# Altium PCB Relay-2.PcbDoc
Units mil, origin at the board's own origin, x right, y up, seen from the top; angles counter-clockwise.
Board outline 1327.97 x 1106.56 mil, 2 copper layers (Top Layer, Bottom Layer); 6 components, 7 nets, 22 pads, 0 vias.
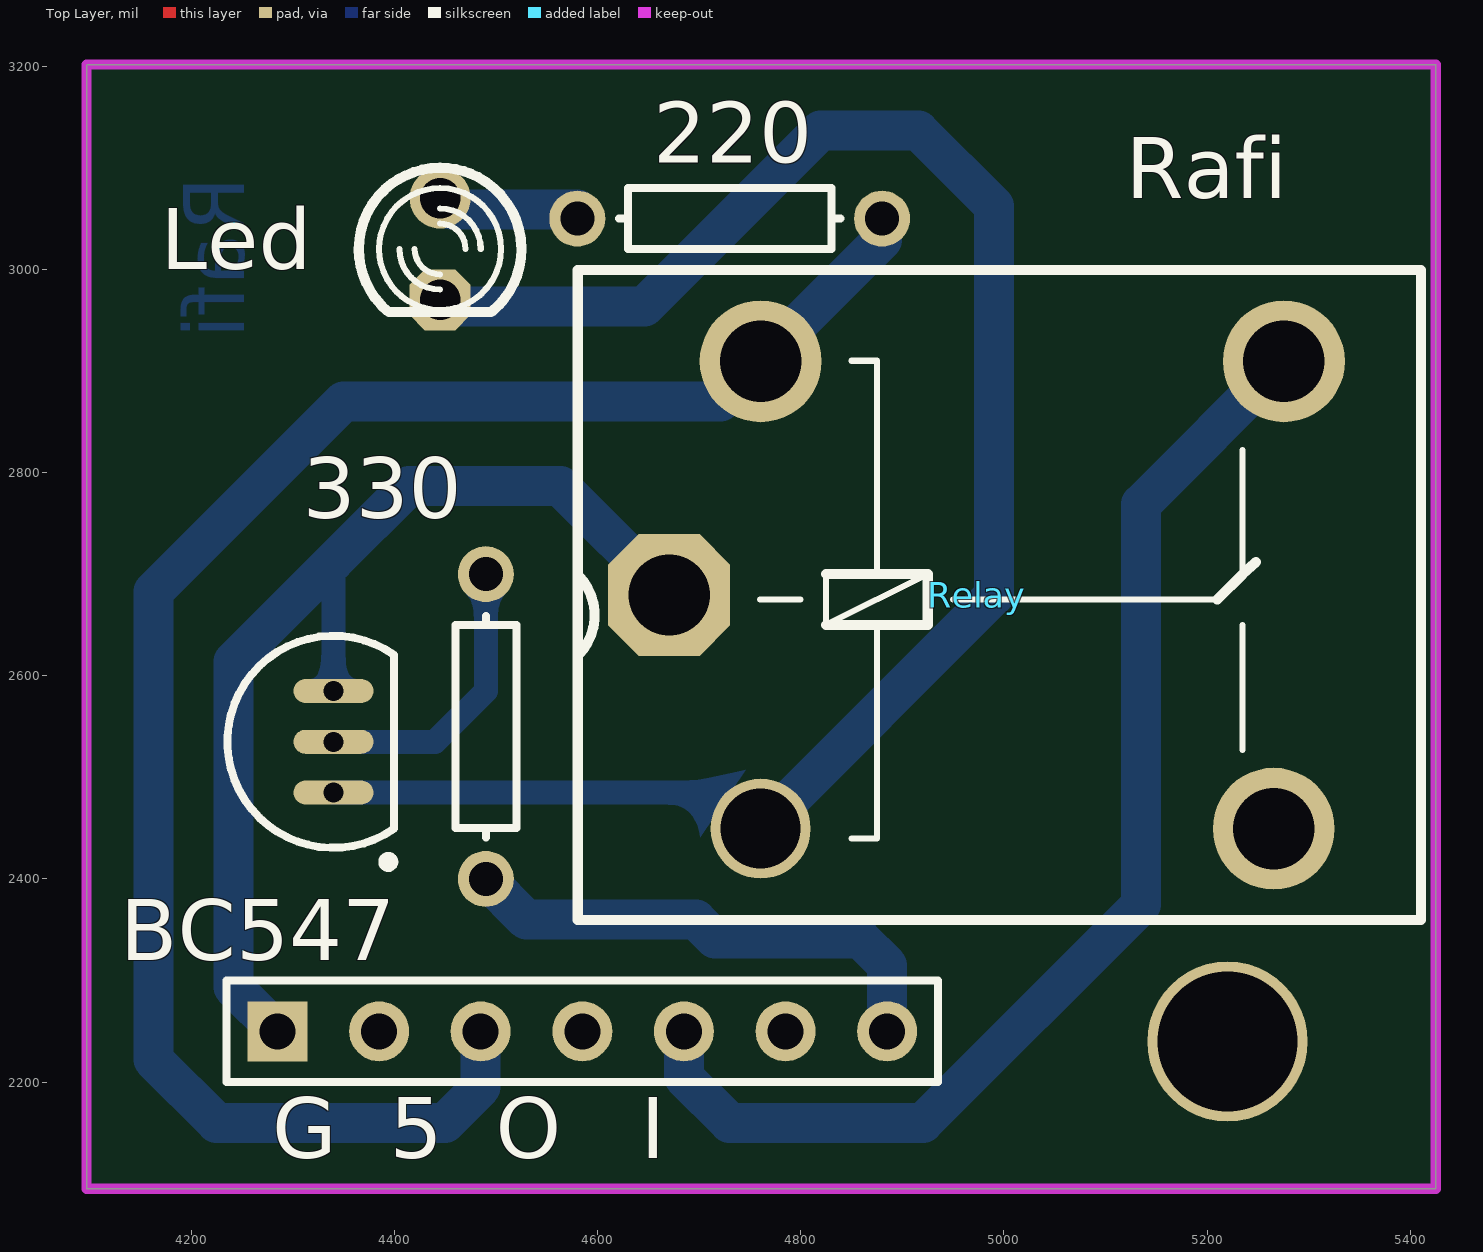
[diagram p0: Top Layer view]
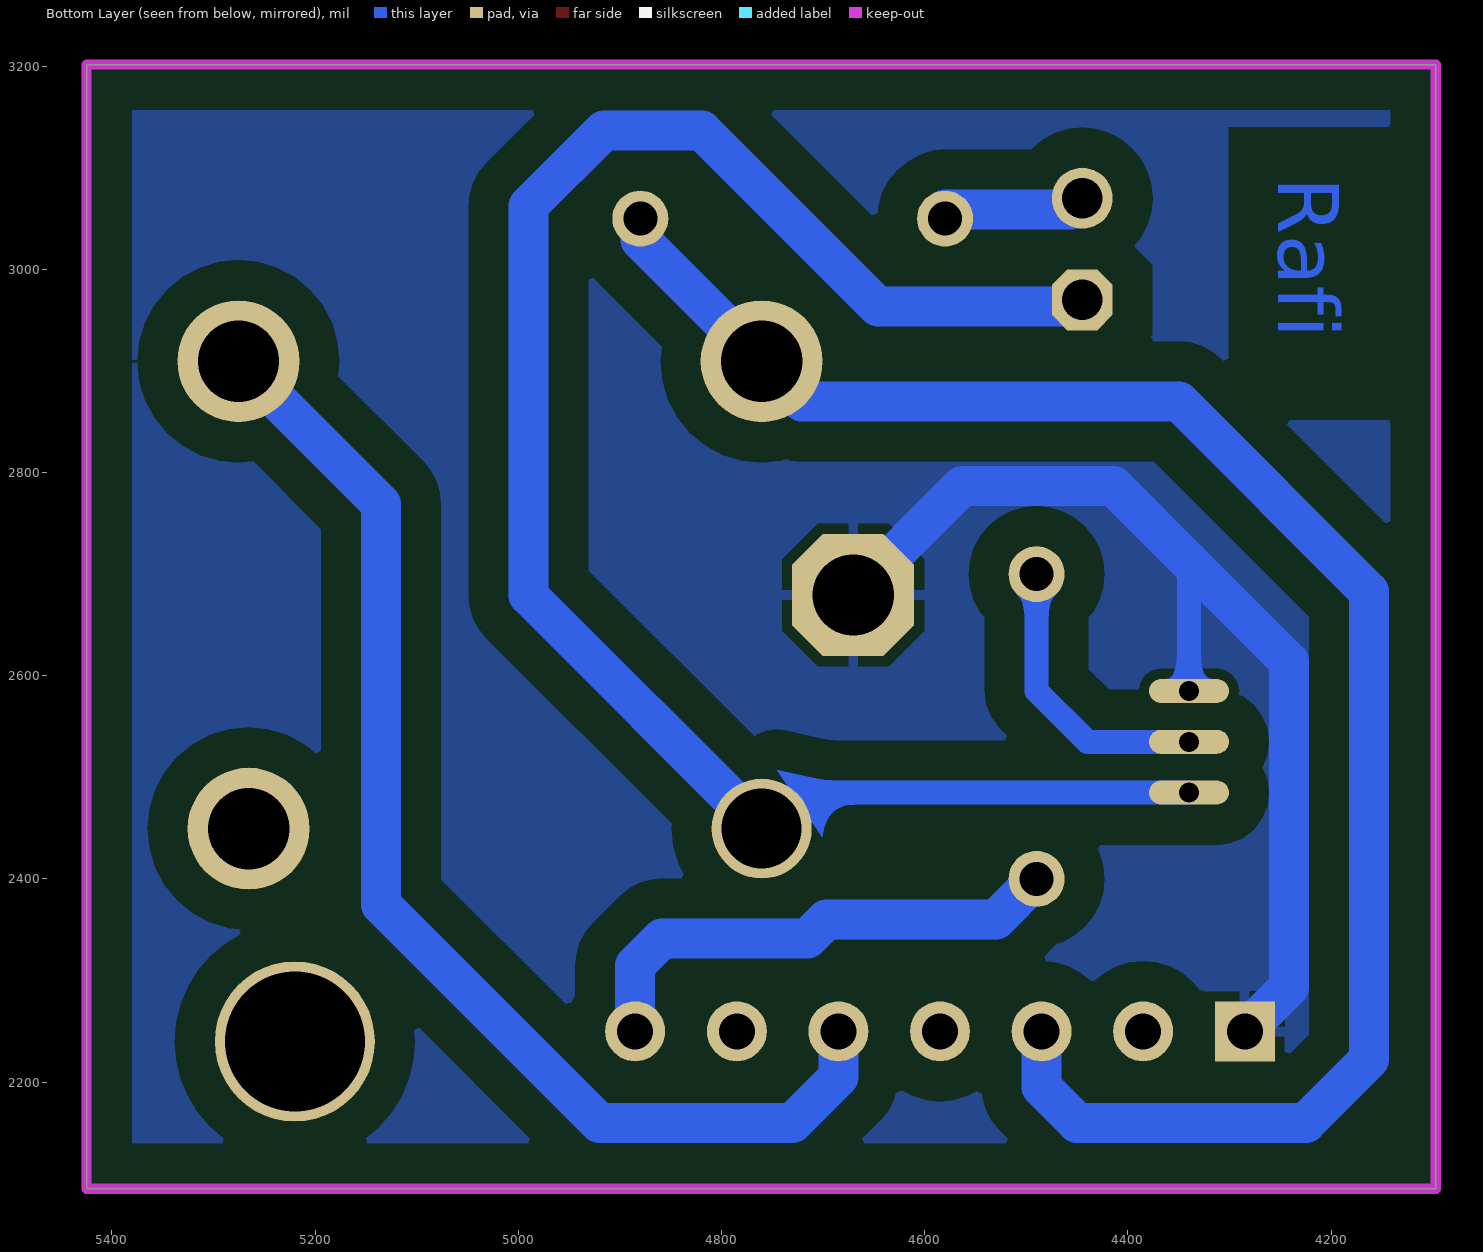
[diagram p1: Bottom Layer view, seen from below]

## Layer stack, top to bottom
Top Solder: solder mask 0.4, Solder Resist, Dk 3.5
Top Layer: signal copper 1.4
Dielectric 1: dielectric 12.6, FR-4, Dk 4.8
Bottom Layer: signal copper 1.4
Bottom Solder: solder mask 0.4, Solder Resist, Dk 3.5

## Board outline
4097.03,2095 5425,2095 5425,3201.56 4097.03,3201.56

## Design rules (kind name [scope] priority, off if disabled: settings)
Clearance [All] p1: gap=39.37
PolygonConnect [All] p1: connectstyle=Relief reliefconductorwidth=10 reliefentries=4 polygonreliefangle="90 Angle" airgapwidth=10
RoutingVias [All] p1: holewidth=28 width=50 viastyle="Through Hole" minholewidth=28 minwidth=50 maxholewidth=28 maxwidth=50
SolderMaskExpansion [All] p1: expansion=4
Width [All] p1: maxlimit=39.37 minlimit=39.37 preferedwidth=39.37
30 further rules are at their usual default settings.

## Components (designator, comment, footprint, x,y, rotation, side; value= is the part's Value field where it differs from the comment)
220 "Res1" AXIAL-0.3 4730,3050 r180 top
330 "Res1" AXIAL-0.3 4490,2550 r90 top (schematic designator 330-1)
BC547 "NPN" TO-226-AA 4340,2535 r0 top
"G  5  O   I" "Header 7" HDR1X7 4285,2250 r0 top (schematic designator P?)
Led "LED" My_LED3MM 4445,3020 r270 top
Relay "Relay-SPDT" My_rel 4945,2680 r90 top

## Footprints (in the part's own frame and the unit in brackets; to place one, negate y for a bottom-side part, rotate by r counter-clockwise, add the part's x,y. Pads: shape width x height; smd on the part's side, far side on the other; paste and mask are expansions set on the pad)
AXIAL-0.3 [mm] "Axial Device, Thru-Hole; 2 Leads; 0.3 in Pin Spacing"
  round 1.4 hole 0.85: 1(-3.81,0) 2(3.81,0)
  silkscreen extent -2.77,-0.76 2.77,0.76
HDR1X7 [mm] "Connector; Header; 7 Position"
  rect 1.5x1.5 hole 0.9: 1(0,0)
  round 1.5 hole 0.9: 2(2.54,0) 3(5.08,0) 4(7.62,0) 5(10.16,0) 6(12.7,0) 7(15.24,0)
  silkscreen extent -1.27,-1.27 16.51,1.27
My_LED3MM [mil]
  round 60 hole 40: A(-50,0)
  oct 60x60 hole 40: K(50,0)
  silkscreen extent -80,-80 62,80
My_rel [mil]
  oct 120x120 hole 80: 1(-0.5,274.5)
  round 120 hole 80: 2(-230.5,-320.5) 3(229.5,-330.5) 5(229.5,184.5)
  round 98.43 hole 78.74: 4(-230.5,184.5)
  silkscreen extent -320,-466 320,365
TO-226-AA [mm] "TO, Flat Index; 3 In-Line, Axial Leads; Body Dia. 4.8mm; Leads 0.55 x 0.51 mm (max)"
  oval 2x0.6 hole 0.5: 1(0,-1.27) 2(0,0) 3(0,1.27)
  silkscreen extent -2.65,-3.13 1.52,2.65, body extent -2.66,-2.66 1.52,2.66, height 5.33

## Part data
220 330: "Resistor"
BC547: "NPN Bipolar Transistor"
"G  5  O   I": "Header, 7-Pin"
Led: "Typical INFRARED GaAs LED"
Relay: "standard single contact relay"

## Free pads (board coordinates)
  round 157.48 hole 137.8: 10(5220,2240)

## Nets (pads, with @x,y where several pads share a name; then routed paths per layer and width w, separated by ;. In a path a pad name is that pad's centre, name@x,y a point inside that pad or via, vN(x,y) a via of type N, cw(c..) or ccw(c..) an arc to the next point about the centre after c; other vN are vias at no path point)
+5: 220.1 "G  5  O   I.3" Relay.5 | length 1759.6
  Bottom Layer w39.37: 4485,2250 4485,2195 4450,2160 4225,2160 4162.83,2222.17 4162.83,2682.83 4350,2870 4721,2870 Relay.5 4880,3029 220.1
GND: "G  5  O   I.1" BC547.3 Relay.1 | length 1054.2
  Bottom Layer w23.62: BC547.3 4340,2712.43
  Bottom Layer w39.37: 4285,2250 4241.57,2293.43 4241.57,2614 4340,2712.43 4414.19,2786.61 4563.39,2786.61 Relay.1
Net220_2: 220.2 Led.A | length 148.6
  Bottom Layer w39.37: Led.A 4455.94,3059.06 4580,3059.06 220.2
Net330-1_1: 330.1 "G  5  O   I.7" | length 495.2
  Bottom Layer w39.37: 330.1 4530,2360 4696.89,2360 4715.65,2341.23 4858.77,2341.23 4885,2315 4885,2250
Net330-1_2: 330.2 BC547.2 | length 285.7
  Bottom Layer w23.62: BC547.2 4440,2535 4490,2585 330.2
NetBC547_1: BC547.1 Led.K Relay.4 | length 1797.3
  Bottom Layer w23.62: BC547.1 4725,2485 Relay.4
  Bottom Layer w39.37: Led.K 4445,2963.39 4646.02,2963.39 4819.24,3136.61 4915.88,3136.61 4990,3062.49 4990,2679 Relay.4
NetP?_5: "G  5  O   I.5" Relay.3 | length 1195.6
  Bottom Layer w39.37: 4685,2250 4685,2205 4730,2160 4920.27,2160 5135,2374.73 5135,2769 Relay.3
pads on no net: "G  5  O   I.2" "G  5  O   I.4" "G  5  O   I.6" Relay.2

## Polygon pours and split planes (outlines as drawn)
GND on Bottom Layer "Bottom Layer-GND" (solid, pour order 5): 4100,3201.56 4097.03,3198.59 4097.03,2095 5425,2095 5425,3201.56 4100,3201.56

## Keep-outs
Keep-Out Layer:
  the board outline again, w10

## Other copper
Bottom Layer:
  text "Rafi" at 4252,3091 h60 r90

## Silkscreen, mask and mechanical layers (free items; w line width, h text height)
Top Overlay:
  text "Rafi" at 5120,3070 h60

## Dimensions
5425,2095 to 5425,3201.56 on Bottom Layer
4097.03,2095 to 5425,2095 on Bottom Layer